# Altium PCB battery_module.PcbDoc
Units mm, origin at the board's own origin, x right, y up, seen from the top; angles counter-clockwise.
Board outline 90 x 40 mm, 2 copper layers (Top Layer, Bottom Layer), stack 2.021 mm thick; 8 components, 3 nets, 13 pads, 0 vias.
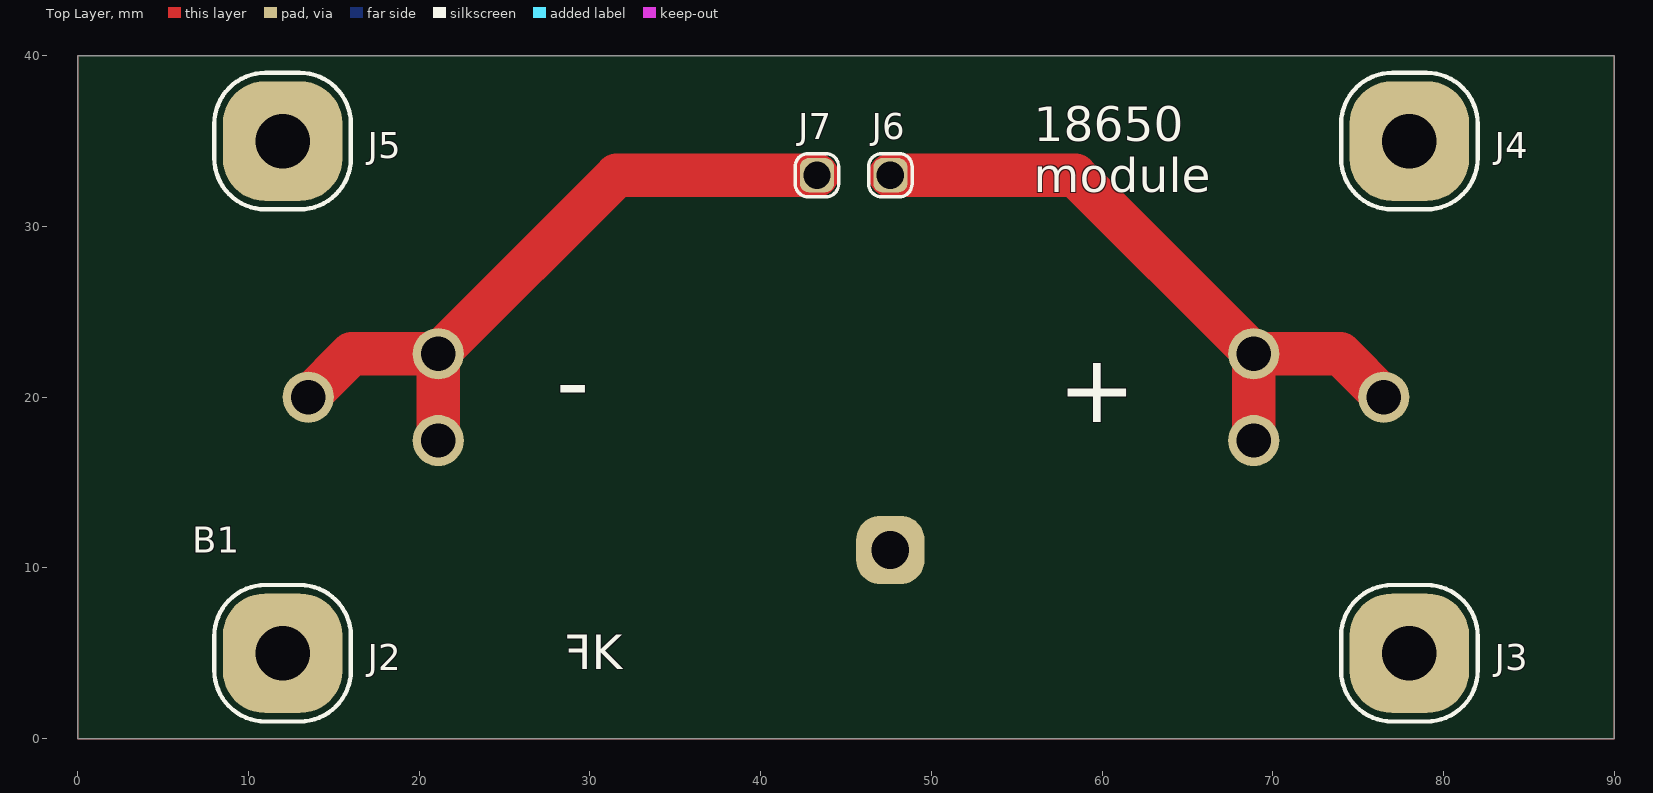
[diagram p0: Top Layer view]
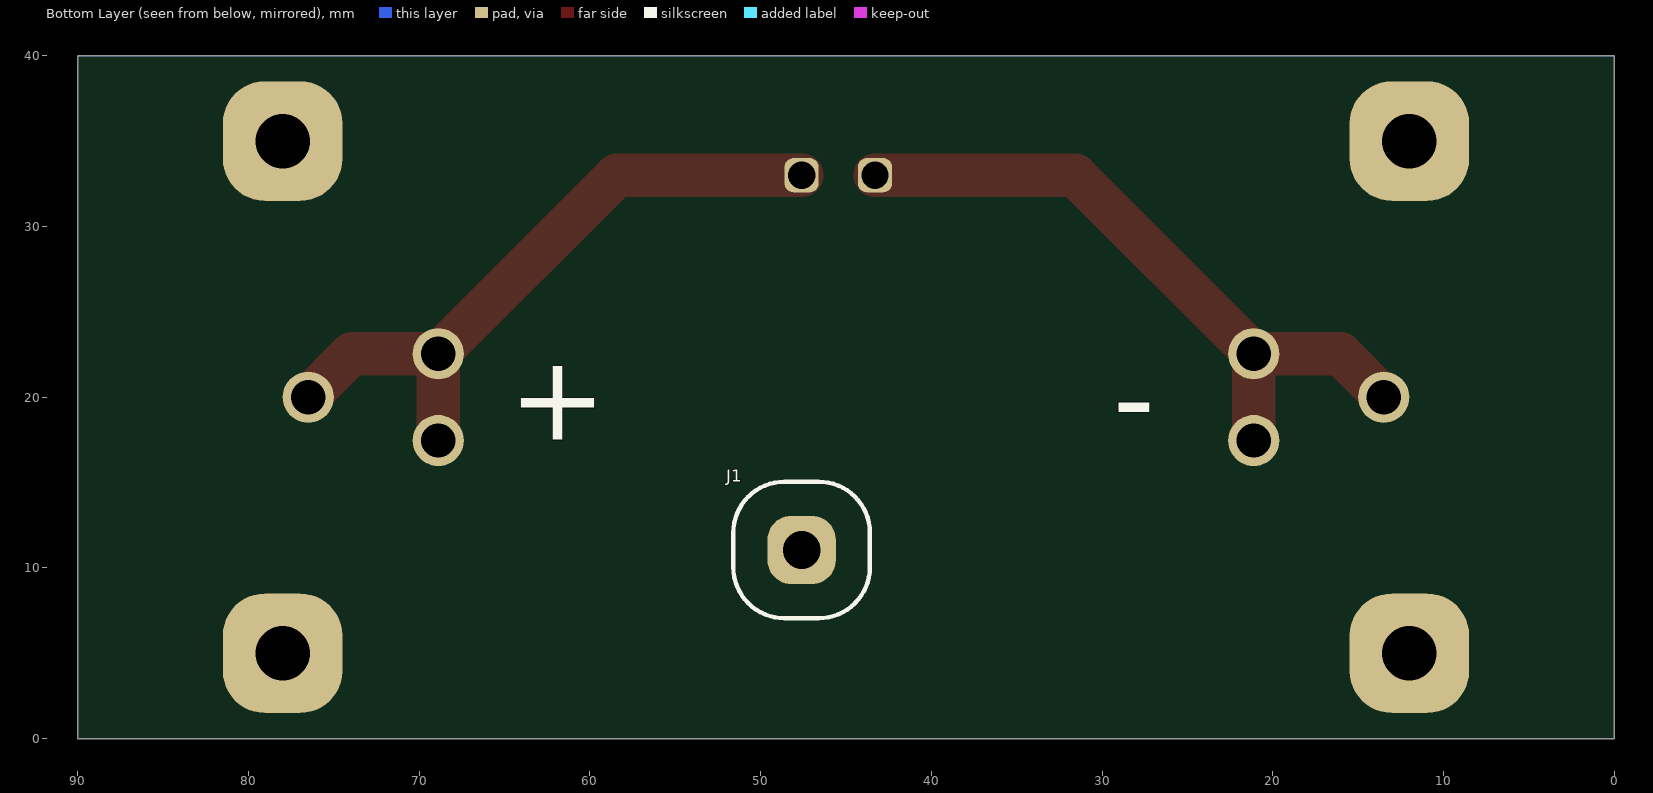
[diagram p1: Bottom Layer view, seen from below]

## Layer stack, top to bottom
Top Solder: solder mask 0.0102, Solder Resist, Dk 3.5
Top Layer: signal copper 0.0356
Dielectric 1: dielectric 1.95, FR-4, Dk 4.8
Bottom Layer: signal copper 0.0356
Bottom Solder: solder mask 0.0102, Solder Resist, Dk 3.5

## Board outline
0,0 90,0 90,40 0,40

## Design rules (kind name [scope] priority, off if disabled: settings)
Clearance ClearanceOfPolyPoly [inpoly vs inpoly] p1: gap=0.6 ignorepadtopadclearanceinfootprint=FALSE
Clearance ClearanceOfPoly [All vs inpoly] p2: gap=0.3 ignorepadtopadclearanceinfootprint=FALSE
Clearance [All] p3: gap=0.2 ignorepadtopadclearanceinfootprint=FALSE except(0: Arc-Hole Track-Hole SMDPad-Hole THPad-Hole Via-Hole Fill-Hole Poly-Hole Region-Hole Text-Hole)
ComponentClearance [All] p1 off: gap=0.1 collisioncheckmode=3 verticalgap=0.1 showdistances=FALSE
DiffPairsRouting [All] p1: maxlimit=0.5 minlimit=0.15 mostfreqgap=0.2 toplayer_minwidth=0.3 toplayer_maxwidth=0.381 toplayer_prefwidth=0.381 bottomlayer_minwidth=0.3 bottomlayer_maxwidth=0.381 bottomlayer_prefwidth=0.381 maxuncoupledlength=12.7
Height [All] p1 off: minheight=0 maxheight=25.4 prefheight=12.7
HoleSize [All] p1: absolutevalues=TRUE maxlimit=10 minlimit=0.4 maxpercent=80.000 minpercent=20.000
HoleSize Testpoint [All] p2: absolutevalues=TRUE maxlimit=2.54 minlimit=0.025 maxpercent=80.000 minpercent=20.000
HoleSize TestPointUsage [All] p3: absolutevalues=TRUE maxlimit=2.54 minlimit=0.025 maxpercent=80.000 minpercent=20.000
HoleToHoleClearance [All] p1 off: gap=0.2 allowstackedmicrovias=TRUE
MinimumSolderMaskSliver [All] p1 off: minsoldermaskwidth=0.15
PlaneClearance [All] p1: clearance=0.15
PlaneConnect [All] p1: planeconnectstyle=Relief reliefexpansion=0.3 reliefentries=4 reliefconductorwidth=0.3 reliefairgap=0.2
PolygonConnect PolygonConnectToNonVia_LargePad [IsPoly vs (not IsVia) and (AsMM(HoleDiameter) > 1.0)] p1: connectstyle=Relief reliefconductorwidth=1 reliefentries=4 polygonreliefangle="90 Angle" airgapwidth=0.254
PolygonConnect PolygonConnectToNonVia [IsPoly vs not IsVia] p2: connectstyle=Relief reliefconductorwidth=0.3 reliefentries=4 polygonreliefangle="90 Angle" airgapwidth=0.254
PolygonConnect PolygonConnectToVia [IsPoly vs IsVia] p3: connectstyle=Direct reliefconductorwidth=0.254 reliefentries=4 polygonreliefangle="90 Angle" airgapwidth=0.254
RoutingVias [All] p1: holewidth=0.4 width=0 viastyle="Through Hole" minholewidth=0.39 minwidth=0.69 maxholewidth=2.6 maxwidth=3.1
SilkToSilkClearance [All] p1: silktosilkclearance=0.01
SilkToSolderMaskClearance SilkscreenOverComponentPads [IsPad] p1: minsilkscreentomaskgap=0.05 clearancetoexposedcopper=TRUE
SolderMaskExpansion [All] p1: expansion=0.1
Width [All] p1: maxlimit=20 minlimit=0.15 preferedwidth=0.5
20 further rules are at their usual default settings.

## Components (designator, comment, footprint, x,y, rotation, side; value= is the part's Value field where it differs from the comment)
B1 "18650" 18650 45,20 r180 top locked
J1 "M3" HOLE_M3#1 47.6,11.05 r180 bottom
J2 "M3" HOLE_M3#2 12,5 r0 top
J3 "M3" HOLE_M3#2 78,5 r0 top
J4 "M3" HOLE_M3#2 78,35 r0 top
J5 "M3" HOLE_M3#2 12,35 r0 top
J6 "Pad" "Hole 1.6mm" 47.6,33 r0 top
J7 "Pad" "Hole 1.6mm" 43.3,33 r0 top

## Footprints (in the part's own frame and the unit in brackets; to place one, negate y for a bottom-side part, rotate by r counter-clockwise, add the part's x,y. Pads: shape width x height; smd on the part's side, far side on the other; paste and mask are expansions set on the pad)
18650 [mm]
  round 3 hole 2: 1(-31.5,0) 1(-23.88,-2.54) 1(-23.88,2.54) 2(23.88,-2.54) 2(23.88,2.54) 2(31.5,0)
  body extent -34.92,-9.44 34.92,9.44, height 18.16
"Hole 1.6mm" [mm] "Hole 1.6mm"
  rrect50% 2x2 hole 1.6: 1(0,0)
  silkscreen extent -1.27,-1.27 1.27,1.27
HOLE_M3#1 [mm]
  rrect70% 4x4 hole 2.2 mask-4: 1(0,0)
  silkscreen extent -4,-4 4,4
HOLE_M3#2 [mm]
  rrect70% 7x7 hole 3.2 mask-4: 1(0,0)
  silkscreen extent -4,-4 4,4

## Part data
J1 J2 J3 J4 J5: library part "Screw M3 Hole", "Power Element with threaded hole M3"
B1: Supplier=TME, Symbol="KEYSTONE 54", URL=https://www.tme.eu/pl/details/keys54/baterie-pojemniki-i-uchwyty/keystone/54/

## Nets (pads, with @x,y where several pads share a name; then routed paths per layer and width w, separated by ;. In a path a pad name is that pad's centre, name@x,y a point inside that pad or via, vN(x,y) a via of type N, cw(c..) or ccw(c..) an arc to the next point about the centre after c; other vN are vias at no path point)
GND: J1.1 J2.1 J3.1 J4.1 J5.1
NetB1_1: B1.1 J6.1 | length 39.4
  Top Layer w2.54: J6.1 58.42,33 B1.1@68.88,22.54 ; B1.1@68.88,17.46 B1.1@68.88,22.54 ; B1.1@76.5,20 73.96,22.54 B1.1@68.88,22.54
NetB1_2: B1.2 J7.1 | length 40.3
  Top Layer w2.54: B1.2@13.5,20 16.04,22.54 B1.2@21.12,22.54 ; B1.2@21.12,17.46 B1.2@21.12,22.54 ; J7.1 31.58,33 B1.2@21.12,22.54

## Polygon pours and split planes (outlines as drawn)
GND on Top Layer "NONET_L01_P000" (solid, remove dead copper, shelved, pour order 0): 0,0 90,0 90,40 0,40
GND on Bottom Layer "NONET_L02_P006" (solid, remove dead copper, shelved, pour order 6): 0,0 90,0 90,40 0,40

## Silkscreen, mask and mechanical layers (free items; w line width, h text height)
Top Overlay:
  text "18650 / module" at 56,32 h2
  text "K" at 30.1,4.06 h2
  text "F" at 30.1,4.06 h2
Bottom Overlay:
  text "-" at 26.9,17.5 h5
  text "+" at 59,17.5 h5
Mechanical 2:
  the board outline again, w0.2

## Text inside footprints (layer, text, board x,y; h text height)
B1: Top Overlay "-" at 30,22 h4 r180; Top Overlay "+" at 62,22 h4 r180